# EAGLE board STM32F446 front pane - v3.1 (EAGLE 9.6.2), part 1 of 5
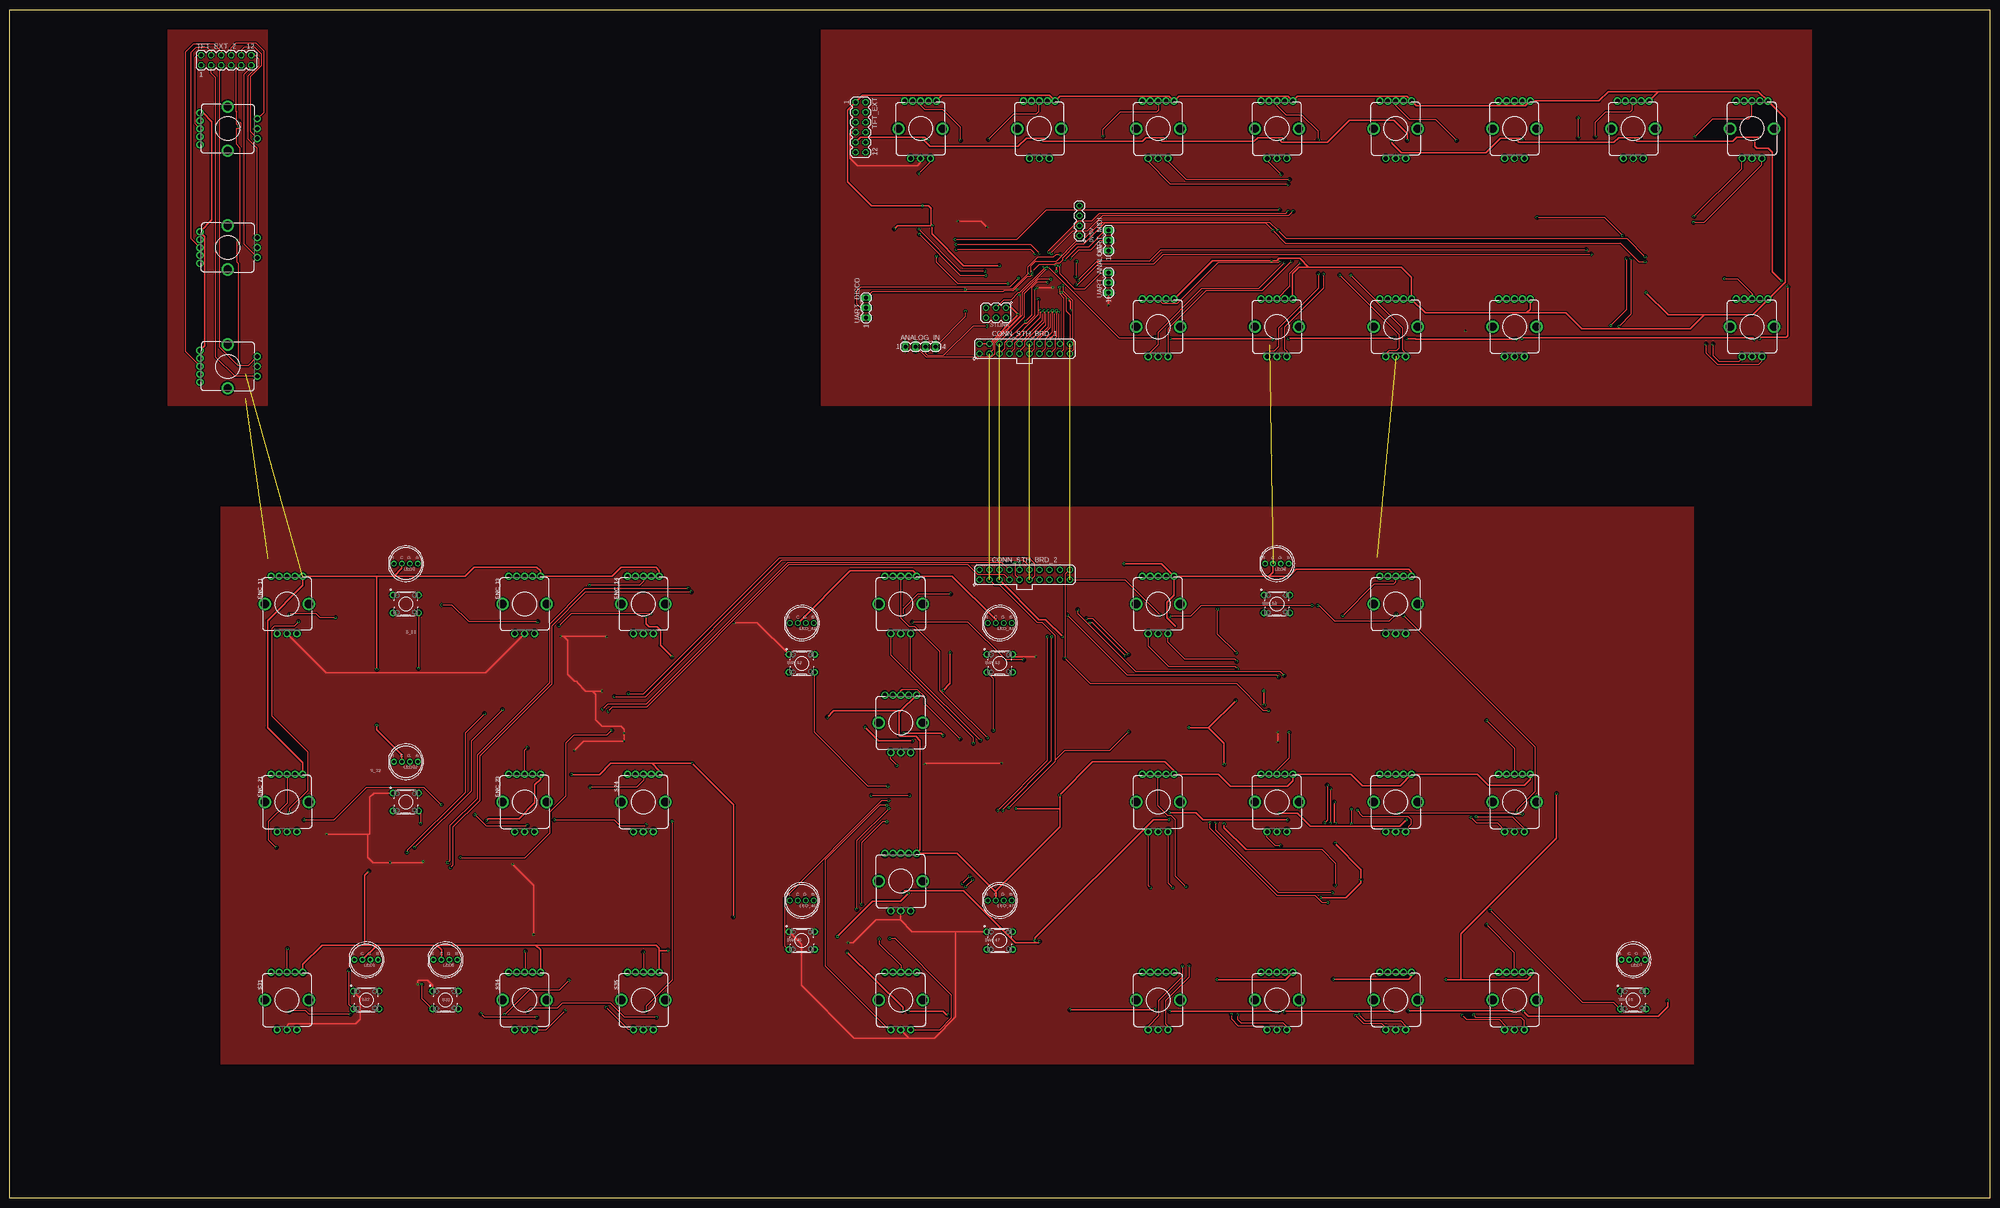
[diagram p0: board, top side]
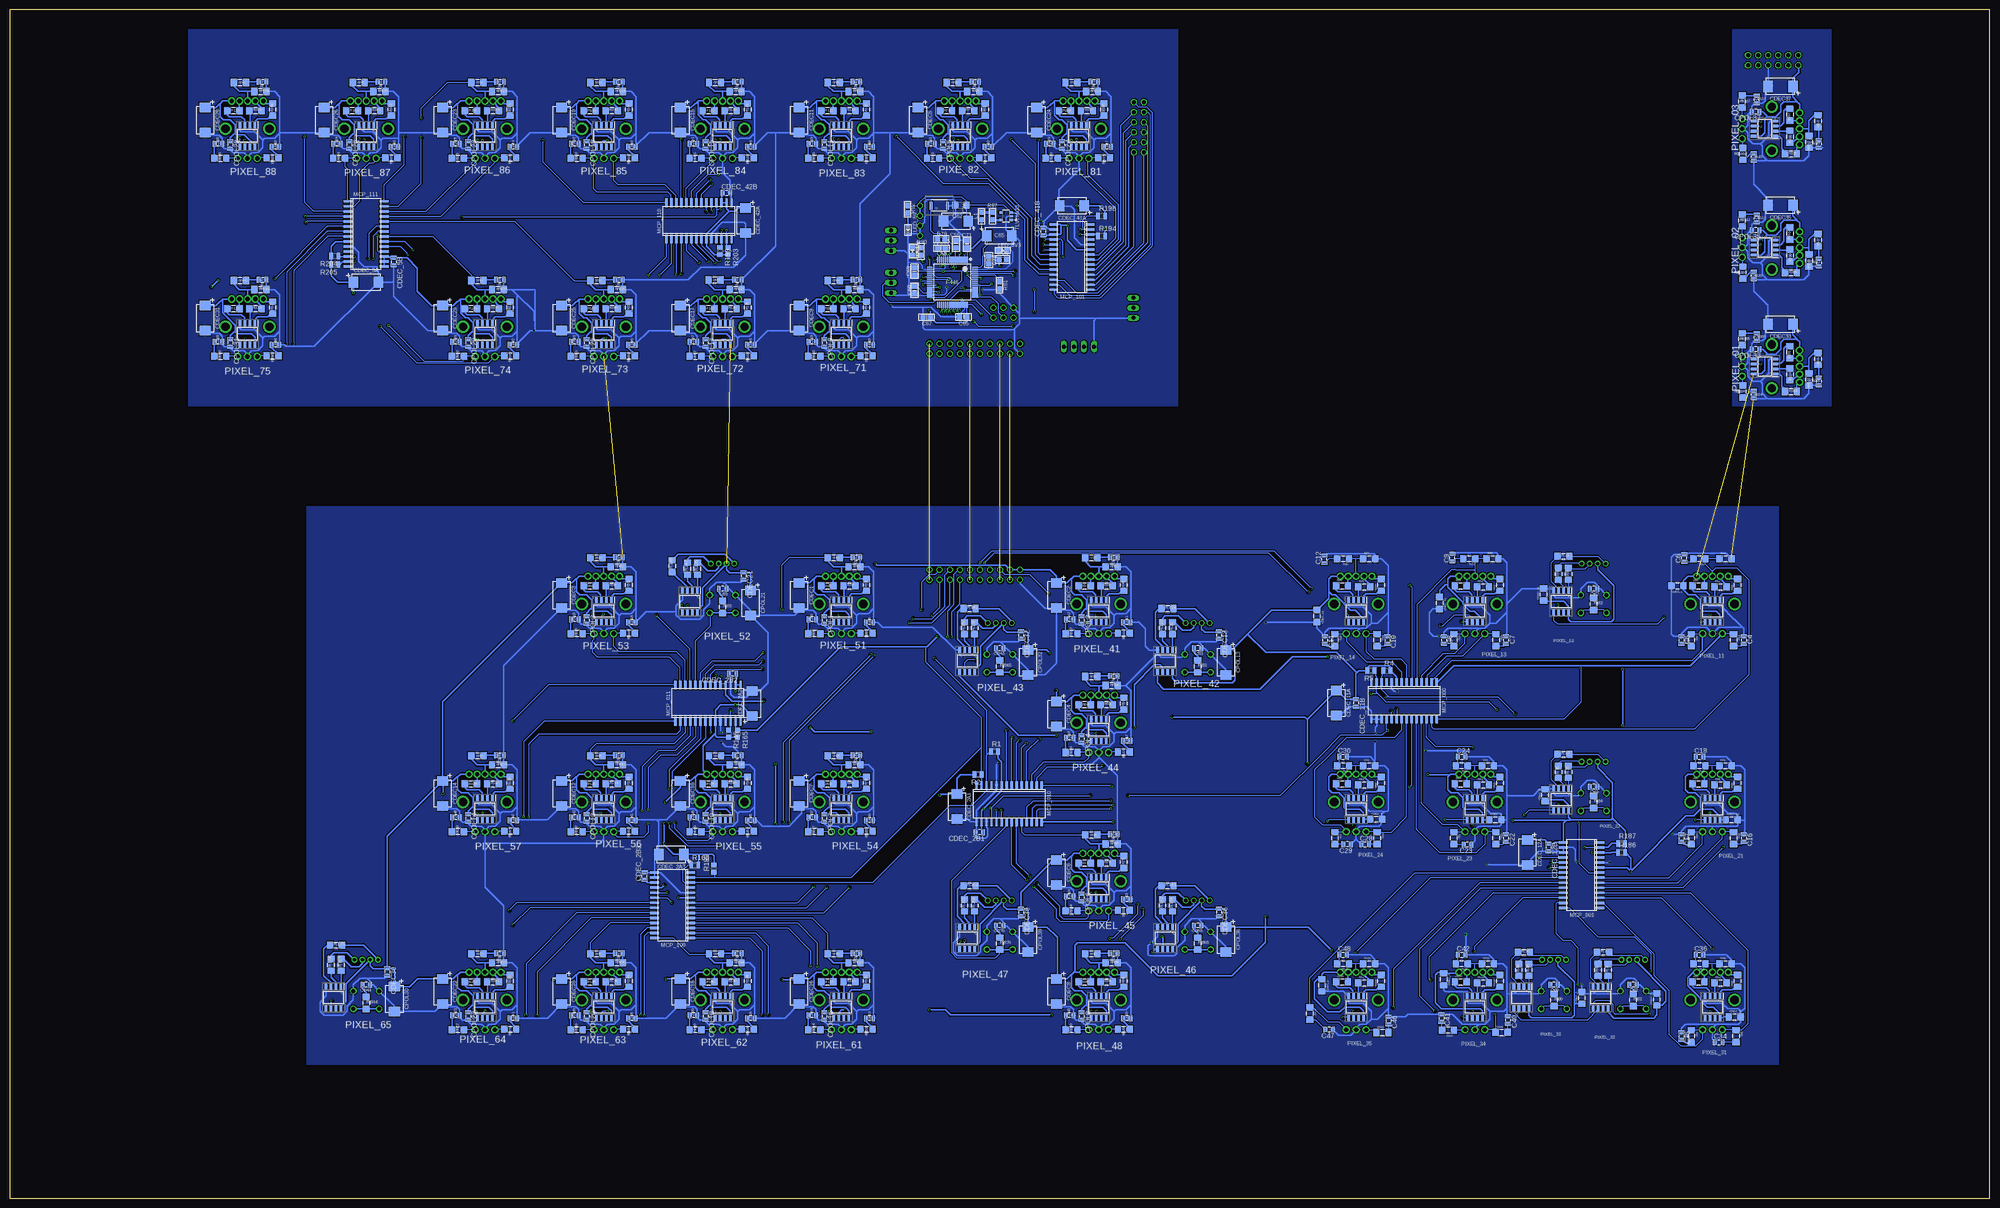
[diagram p1: board, bottom side, seen from below]

Size 500 x 300 mm. Coordinates in mm from the lower left corner, seen from the top.
Outline: 0,300 500,300 500,0 0,0 0,300
Copper layers (1*16): Top 0.035559375mm / dielectric 1.6mm / Bottom 0.035559375mm
Design rules "jlcpcb2layer": minimum track width 5mil, minimum drill 12mil, track to track 5mil, track to pad 5mil, pad to pad 5mil, via to via 5mil, smd to smd 5mil, copper to edge 8mil, drill to drill 6mil, minimum pad ring 5mil, minimum via ring 3mil, stop-mask expansion 2.5mil, vias tented up to drill 0mil, thermal gap 10mil

## Footprints (pad centres in the part's own frame; a part is rotated, then mirrored left to right if it is on the bottom)
MA04-1 = drill 1.016: 1 -3.81,0; 2 -1.27,0; 3 1.27,0; 4 3.81,0
MA04-1' = drill 1.016 long: 1 -3.81,0; 2 -1.27,0; 3 1.27,0; 4 3.81,0
0805-CAP = smd 1 x 1.5: 1 -0.95,0; 2 0.95,0
C0805 = smd 1.3 x 1.5: 1 -0.95,0; 2 0.95,0
CPOL2917 = smd 2.4 x 2.8: + -3.15,0; - 3.15,0
C1206 = smd 1.6 x 1.8: 1 -1.4,0; 2 1.4,0
1206 = smd 1.6 x 1.8: 1 -1.5,0; 2 1.5,0
MA10-2 = drill 1.016: 1 -11.43,-1.27; 2 -11.43,1.27; 3 -8.89,-1.27; 4 -8.89,1.27; 5 -6.35,-1.27; 6 -6.35,1.27; 7 -3.81,-1.27; 8 -3.81,1.27; 9 -1.27,-1.27; 10 -1.27,1.27; 11 1.27,-1.27; 12 1.27,1.27; 13 3.81,-1.27; 14 3.81,1.27; 15 6.35,-1.27; 16 6.35,1.27; 17 8.89,-1.27; 18 8.89,1.27; 19 11.43,-1.27; 20 11.43,1.27
ENCODER_LED_3 = drill 1.1 pad 1.778: 1 -4,7; 2 -2,7; 3 0,7; 4 2,7; 5 4,7 | drill 1.1 pad 1.8: A -2.5,-7.5; B 2.5,-7.5; C 0,-7.5 | drill 2.1: M1 -5.55,0; M2 5.55,0
QFP50P1200X1200X160-64N = smd 1.5 x 0.3: 1 -5.7,3.75; 2 -5.7,3.25; 3 -5.7,2.75; 4 -5.7,2.25; 5 -5.7,1.75; 6 -5.7,1.25; 7 -5.7,0.75; 8 -5.7,0.25; 9 -5.7,-0.25; 10 -5.7,-0.75; 11 -5.7,-1.25; 12 -5.7,-1.75; 13 -5.7,-2.25; 14 -5.7,-2.75; 15 -5.7,-3.25; 16 -5.7,-3.75; 33 5.7,-3.75; 34 5.7,-3.25; 35 5.7,-2.75; 36 5.7,-2.25; 37 5.7,-1.75; 38 5.7,-1.25; 39 5.7,-0.75; 40 5.7,-0.25; 41 5.7,0.25; 42 5.7,0.75; 43 5.7,1.25; 44 5.7,1.75; 45 5.7,2.25; 46 5.7,2.75; 47 5.7,3.25; 48 5.7,3.75 | smd 0.3 x 1.5: 17 -3.75,-5.7; 18 -3.25,-5.7; 19 -2.75,-5.7; 20 -2.25,-5.7; 21 -1.75,-5.7; 22 -1.25,-5.7; 23 -0.75,-5.7; 24 -0.25,-5.7; 25 0.25,-5.7; 26 0.75,-5.7; 27 1.25,-5.7; 28 1.75,-5.7; 29 2.25,-5.7; 30 2.75,-5.7; 31 3.25,-5.7; 32 3.75,-5.7; 49 3.75,5.7; 50 3.25,5.7; 51 2.75,5.7; 52 2.25,5.7; 53 1.75,5.7; 54 1.25,5.7; 55 0.75,5.7; 56 0.25,5.7; 57 -0.25,5.7; 58 -0.75,5.7; 59 -1.25,5.7; 60 -1.75,5.7; 61 -2.25,5.7; 62 -2.75,5.7; 63 -3.25,5.7; 64 -3.75,5.7
0805-LED = smd 1.2 x 1.2: A -1.05,0; C 1.05,0
L0805 = smd 1.3 x 1.5: 1 -0.95,0; 2 0.95,0
LED4-2.0-D8.0MM = drill 0.85 pad 1.4: 1 3,0; 2 1,0; 3 -1,0; 4 -3,0
0603-LED = smd 0.8 x 1: A 0.825,0; C -0.825,0
SOIC-28 = smd 2.2 x 0.6: 1 -4.6,8.255; 2 -4.6,6.985; 3 -4.6,5.715; 4 -4.6,4.445; 5 -4.6,3.175; 6 -4.6,1.905; 7 -4.6,0.635; 8 -4.6,-0.635; 9 -4.6,-1.905; 10 -4.6,-3.175; 11 -4.6,-4.445; 12 -4.6,-5.715; 13 -4.6,-6.985; 14 -4.6,-8.255; 15 4.6,-8.255; 16 4.6,-6.985; 17 4.6,-5.715; 18 4.6,-4.445; 19 4.6,-3.175; 20 4.6,-1.905; 21 4.6,-0.635; 22 4.6,0.635; 23 4.6,1.905; 24 4.6,3.175; 25 4.6,4.445; 26 4.6,5.715; 27 4.6,6.985; 28 4.6,8.255
SOIC127P600X175-8N = smd 1.528 x 0.65: 1 -2.711,1.905; 2 -2.711,0.635; 3 -2.711,-0.635; 4 -2.711,-1.905; 5 2.711,-1.905; 6 2.711,-0.635; 7 2.711,0.635; 8 2.711,1.905
R0805 = smd 1.016 x 1.422: 1 -0.889,0; 2 0.889,0
R0805' = smd 1.3 x 1.5: 1 -0.95,0; 2 0.95,0
SKRKAEE020 = smd 0.8 x 2: 1 -2.1,0; 2 2.1,0
B3F-1000 = drill 1 pad 1.6: 1 -3.25,2.25; 2 3.25,2.25; 3 -3.25,-2.25; 4 3.25,-2.25
MA03-2 = drill 1.016: 1 -2.54,-1.27; 2 -2.54,1.27; 3 0,-1.27; 4 0,1.27; 5 2.54,-1.27; 6 2.54,1.27
MA06-2 = drill 1.016 octagon: 1 -6.35,-1.27; 2 -6.35,1.27; 3 -3.81,-1.27; 4 -3.81,1.27; 5 -1.27,-1.27; 6 -1.27,1.27; 7 1.27,-1.27; 8 1.27,1.27; 9 3.81,-1.27; 10 3.81,1.27; 11 6.35,-1.27; 12 6.35,1.27
SOT95P280X145-5N = smd 1.21 x 0.59: 1 -1.255,0.95; 2 -1.255,0; 3 -1.255,-0.95; 4 1.255,-0.95; 5 1.255,0.95
MA03-1 = drill 1.016 long: 1 -2.54,0; 2 0,0; 3 2.54,0

## Placement (x,y rotation side)
0V/5V  [MA04-1]  270.1,246.75 90 top
ANALOG_IN  [MA04-1']  230,215 0 top
C4  10n  [0805-CAP]  62.13,140.86 270 bottom
C5  10n  [0805-CAP]  77.87,140.86 270 bottom
C6  10n  [0805-CAP]  77.08,161.63 90 bottom
C7  10n  [0805-CAP]  122.13,140.86 270 bottom
C8  10n  [0805-CAP]  137.87,140.86 270 bottom
C9  10n  [0805-CAP]  135.63,161.7 90 bottom
C10  10n  [0805-CAP]  152.13,140.86 270 bottom
C11  10n  [0805-CAP]  167.87,140.86 270 bottom
C12  10n  [0805-CAP]  168.01,161.29 90 bottom
C16  10n  [0805-CAP]  62.13,90.86 270 bottom
C17  10n  [0805-CAP]  77.87,90.86 270 bottom
C18  10n  [0805-CAP]  73.3,111.43 0 bottom
C22  10n  [0805-CAP]  122.13,90.86 270 bottom
C23  10n  [0805-CAP]  131.88,89.25 180 bottom
C24  10n  [0805-CAP]  133.3,111.43 0 bottom
C28  10n  [0805-CAP]  157.77,89.28 0 bottom
C29  10n  [0805-CAP]  162.24,89.28 180 bottom
C30  10n  [0805-CAP]  163.3,111.43 0 bottom
C34  10n  [0805-CAP]  68.4,39.33 0 bottom
C35  10n  [0805-CAP]  77.87,40.86 270 bottom
C36  10n  [0805-CAP]  73.3,61.43 0 bottom
C40  10n  [0805-CAP]  121.62,44.92 270 bottom
C41  10n  [0805-CAP]  138.51,45.43 270 bottom
C42  10n  [0805-CAP]  133.3,61.43 0 bottom
C46  10n  [0805-CAP]  151.87,44.79 270 bottom
C47  10n  [0805-CAP]  166.77,42.54 180 bottom
C48  10n  [0805-CAP]  163.3,61.43 0 bottom
C55  0.1uF  [C0805]  261.1,240.89 270 bottom
C60  2.2uF  [C0805]  271.48,229.24 90 bottom
C62  10u  [CPOL2917]  261.05,246.65 180 bottom
C65  100 uF  [CPOL2917]  250.07,243.02 0 bottom
C66  0.1uF  [C0805]  259.19,222.46 0 bottom
C67  0.1uF  [C0805]  268.46,222.38 0 bottom
C68  0.1uF  [C0805]  264.72,239.78 180 bottom
C69  0.1uF  [C0805]  271.55,233.96 90 bottom
C70  0.1uF  [C0805]  252.77,236.86 90 bottom
C71  1.0uF  [C0805]  258.22,240.83 270 bottom
C76  1u  [C1206]  259.81,250.69 0 bottom
CB1  10n  [0805-CAP]  90,53.81 180 bottom
CB2  10n  [0805-CAP]  100,153.81 180 bottom
CB3  10n  [0805-CAP]  200,138.81 180 bottom
CB4  10n  [0805-CAP]  100,103.81 180 bottom
CB5  10n  [0805-CAP]  320,153.81 180 bottom
CB6  10n  [0805-CAP]  110,53.81 180 bottom
CB8  10n  [0805-CAP]  282.89,145.43 180 bottom
CB9  10n  [0805-CAP]  297.37,146.19 180 bottom
CB10  10n  [0805-CAP]  286.19,161.81 0 bottom
CB11  10n  [0805-CAP]  217.89,145.43 180 bottom
CB12  10n  [0805-CAP]  232.37,146.19 180 bottom
CB13  10n  [0805-CAP]  221.19,161.81 0 bottom
CB14  10n  [0805-CAP]  342.89,145.43 180 bottom
CB15  10n  [0805-CAP]  357.37,146.19 180 bottom
CB16  10n  [0805-CAP]  346.19,161.81 0 bottom
CB17  10n  [0805-CAP]  217.89,115.43 180 bottom
CB18  10n  [0805-CAP]  232.37,116.19 180 bottom
CB19  10n  [0805-CAP]  221.19,131.81 0 bottom
CB20  10n  [0805-CAP]  252.89,265.43 180 bottom
CB21  10n  [0805-CAP]  267.37,266.19 180 bottom
CB22  10n  [0805-CAP]  256.19,281.81 0 bottom
CB23  10n  [0805-CAP]  217.89,75.43 180 bottom
CB24  10n  [0805-CAP]  232.37,76.19 180 bottom
CB25  10n  [0805-CAP]  221.19,91.81 0 bottom
CB26  10n  [0805-CAP]  282.89,95.43 180 bottom
CB27  10n  [0805-CAP]  297.37,96.19 180 bottom
CB28  10n  [0805-CAP]  286.19,111.81 0 bottom
CB29  10n  [0805-CAP]  217.89,45.43 180 bottom
CB30  10n  [0805-CAP]  232.37,46.19 180 bottom
CB31  10n  [0805-CAP]  221.19,61.81 0 bottom
CB32  10n  [0805-CAP]  282.89,215.43 180 bottom
CB33  10n  [0805-CAP]  297.37,216.19 180 bottom
CB34  10n  [0805-CAP]  286.19,231.81 0 bottom
CB35  10n  [0805-CAP]  312.89,95.43 180 bottom
CB36  10n  [0805-CAP]  327.37,96.19 180 bottom
CB37  10n  [0805-CAP]  316.19,111.81 0 bottom
CB38  10n  [0805-CAP]  282.89,265.43 180 bottom
CB39  10n  [0805-CAP]  297.37,266.19 180 bottom
CB40  10n  [0805-CAP]  286.19,281.81 0 bottom
CB41  10n  [0805-CAP]  342.89,95.43 180 bottom
CB42  10n  [0805-CAP]  357.37,96.19 180 bottom
CB43  10n  [0805-CAP]  346.19,111.81 0 bottom
CB44  10n  [0805-CAP]  410,53.81 180 bottom
CB45  10n  [0805-CAP]  250,138.81 180 bottom
CB47  10n  [0805-CAP]  372.89,95.43 180 bottom
CB48  10n  [0805-CAP]  387.37,96.19 180 bottom
CB49  10n  [0805-CAP]  376.19,111.81 0 bottom
CB50  10n  [0805-CAP]  312.89,265.43 180 bottom
CB51  10n  [0805-CAP]  327.37,266.19 180 bottom
CB52  10n  [0805-CAP]  316.19,281.81 0 bottom
CB53  10n  [0805-CAP]  282.89,45.43 180 bottom
CB54  10n  [0805-CAP]  297.37,46.19 180 bottom
CB55  10n  [0805-CAP]  286.19,61.81 0 bottom
CB56  10n  [0805-CAP]  312.89,215.43 180 bottom
CB57  10n  [0805-CAP]  327.37,216.19 180 bottom
CB58  10n  [0805-CAP]  316.19,231.81 0 bottom
CB59  10n  [0805-CAP]  312.89,45.43 180 bottom
CB60  10n  [0805-CAP]  327.37,46.19 180 bottom
CB61  10n  [0805-CAP]  316.19,61.81 0 bottom
CB62  10n  [0805-CAP]  342.89,265.43 180 bottom
CB63  10n  [0805-CAP]  357.37,266.19 180 bottom
CB64  10n  [0805-CAP]  346.19,281.81 0 bottom
CB65  10n  [0805-CAP]  342.89,45.43 180 bottom
CB66  10n  [0805-CAP]  357.37,46.19 180 bottom
CB67  10n  [0805-CAP]  346.19,61.81 0 bottom
CB68  10n  [0805-CAP]  200,68.81 180 bottom
CB70  10n  [0805-CAP]  250,68.81 180 bottom
CB71  10n  [0805-CAP]  372.89,45.43 180 bottom
CB72  10n  [0805-CAP]  387.37,46.19 180 bottom
CB73  10n  [0805-CAP]  376.19,61.81 0 bottom
CB74  10n  [0805-CAP]  372.89,265.43 180 bottom
CB75  10n  [0805-CAP]  387.37,266.19 180 bottom
CB76  10n  [0805-CAP]  376.19,281.81 0 bottom
CB77  10n  [0805-CAP]  222.89,265.43 180 bottom
CB78  10n  [0805-CAP]  237.37,266.19 180 bottom
CB79  10n  [0805-CAP]  226.19,281.81 0 bottom
CB80  10n  [0805-CAP]  342.89,215.43 180 bottom
CB81  10n  [0805-CAP]  357.37,216.19 180 bottom
CB82  10n  [0805-CAP]  346.19,231.81 0 bottom
CB83  10n  [0805-CAP]  402.89,265.43 180 bottom
CB84  10n  [0805-CAP]  417.37,266.19 180 bottom
CB85  10n  [0805-CAP]  406.19,281.81 0 bottom
CB89  10n  [0805-CAP]  432.89,265.43 180 bottom
CB90  10n  [0805-CAP]  447.37,266.19 180 bottom
CB91  10n  [0805-CAP]  436.19,281.81 0 bottom
CB92  10n  [0805-CAP]  372.89,215.43 180 bottom
CB93  10n  [0805-CAP]  387.37,216.19 180 bottom
CB94  10n  [0805-CAP]  376.19,231.81 0 bottom
CB98  10n  [0805-CAP]  432.89,215.43 180 bottom
CB99  10n  [0805-CAP]  447.37,216.19 180 bottom
CB100  10n  [0805-CAP]  436.19,231.81 0 bottom
CB104  10n  [0805-CAP]  59.57,202.89 90 bottom
CB105  10n  [0805-CAP]  58.81,217.37 90 bottom
CB106  10n  [0805-CAP]  43.19,206.19 270 bottom
CB110  10n  [0805-CAP]  59.57,232.89 90 bottom
CB111  10n  [0805-CAP]  58.81,247.37 90 bottom
CB112  10n  [0805-CAP]  43.19,236.19 270 bottom
CB116  10n  [0805-CAP]  59.57,262.89 90 bottom
CB117  10n  [0805-CAP]  58.81,277.37 90 bottom
CB118  10n  [0805-CAP]  43.19,266.19 270 bottom
CDEC1  10u  [CPOL2917]  300.67,152.16 270 bottom
CDEC2  10u  [CPOL2917]  235.67,152.16 270 bottom
CDEC3  10u  [CPOL2917]  360.67,152.16 270 bottom
CDEC4  10u  [CPOL2917]  235.67,122.16 270 bottom
CDEC5  10u  [CPOL2917]  270.67,272.16 270 bottom
CDEC6  10u  [CPOL2917]  235.67,82.16 270 bottom
CDEC7  10u  [CPOL2917]  300.67,102.16 270 bottom
CDEC8  10u  [CPOL2917]  235.67,52.16 270 bottom
CDEC9  10u  [CPOL2917]  300.67,222.16 270 bottom
CDEC10  10u  [CPOL2917]  330.67,102.16 270 bottom
CDEC11  10u  [CPOL2917]  300.67,272.16 270 bottom
CDEC12  10u  [CPOL2917]  360.67,102.16 270 bottom
CDEC13  100n  [0805-CAP]  194.67,142.11 270 bottom
CDEC14  10u  [CPOL2917]  390.67,102.16 270 bottom
CDEC15  10u  [CPOL2917]  330.67,272.16 270 bottom
CDEC16  10u  [CPOL2917]  300.67,52.16 270 bottom
CDEC17  10u  [CPOL2917]  330.67,222.16 270 bottom
CDEC18  10u  [CPOL2917]  330.67,52.16 270 bottom
CDEC19  10u  [CPOL2917]  360.67,272.16 270 bottom
CDEC20  10u  [CPOL2917]  360.67,52.16 270 bottom
CDEC21  100n  [0805-CAP]  314.67,157.11 270 bottom
CDEC22  10u  [CPOL2917]  390.67,52.16 270 bottom
CDEC23  10u  [CPOL2917]  390.67,272.16 270 bottom
CDEC24  10u  [CPOL2917]  240.67,272.16 270 bottom
CDEC25  10u  [CPOL2917]  360.67,222.16 270 bottom
CDEC26  10u  [CPOL2917]  420.67,272.16 270 bottom
CDEC28  10u  [CPOL2917]  450.67,272.16 270 bottom
CDEC29  10u  [CPOL2917]  390.67,222.16 270 bottom
CDEC30  100n  [0805-CAP]  404.67,57.11 270 bottom
CDEC31  10u  [CPOL2917]  450.67,222.16 270 bottom
CDEC32  100n  [0805-CAP]  244.67,142.11 270 bottom
CDEC33  10u  [CPOL2917]  52.84,220.67 180 bottom
CDEC35  10u  [CPOL2917]  52.84,250.67 180 bottom
CDEC36  100n  [0805-CAP]  194.67,72.11 270 bottom
CDEC37  10u  [CPOL2917]  52.84,280.67 180 bottom
CDEC39  100n  [0805-CAP]  244.67,72.11 270 bottom
CDEC_1  100n  [1206]  84.06,50.16 90 bottom
CDEC_2  100n  [1206]  102.98,50.55 90 bottom
CDEC_2A1  10u  [CPOL2917]  260.84,98.81 270 bottom
CDEC_2A2  10u  [CPOL2917]  312.53,124.84 90 bottom
CDEC_2A3  10u  [CPOL2917]  332.98,86.74 180 bottom
CDEC_2B1  100n  [0805-CAP]  255.12,92.33 180 bottom
CDEC_2B2  100n  [0805-CAP]  317.48,132.33 180 bottom
CDEC_2B3  100n  [0805-CAP]  339.71,81.28 90 bottom
CDEC_3  100n  [1206]  64.37,45.72 0 bottom
CDEC_4  100n  [1206]  137.9,55.24 270 bottom
CDEC_5  100n  [1206]  168.64,53.72 270 bottom
CDEC_5A  10u  [CPOL2917]  410.06,231.23 0 bottom
CDEC_5B  100n  [0805-CAP]  403.08,236.44 270 bottom
CDEC_6  100n  [1206]  154.92,95.63 0 bottom
CDEC_7  100n  [1206]  124.82,95.5 0 bottom
CDEC_8  100n  [1206]  112.25,101.73 90 bottom
CDEC_9  100n  [1206]  78.85,154.56 180 bottom
CDEC_10  100n  [1206]  112.63,152.4 90 bottom
CDEC_11  100n  [1206]  138.92,150.24 270 bottom
CDEC_11A  10u  [CPOL2917]  165,125 270 bottom
CDEC_11B  100n  [0805-CAP]  160,125 270 bottom
CDEC_12  100n  [1206]  65.13,95.5 0 bottom
CDEC_12A  10u  [CPOL2917]  116.69,87.26 270 bottom
CDEC_12B  100n  [0805-CAP]  111.4,88.53 270 bottom
CDEC_13  100n  [1206]  169.91,146.94 270 bottom
CDEC_41A  10u  [CPOL2917]  231.76,250.54 180 bottom
CDEC_41B  100n  [0805-CAP]  239,244.06 90 bottom
CDEC_42A  10u  [CPOL2917]  314.18,246.85 270 bottom
CDEC_42B  100n  [0805-CAP]  319,253.84 0 bottom
CONN_STH_BRD_1  [MA10-2]  256.27,214.47 0 top
CONN_STH_BRD_2  [MA10-2]  256.27,157.35 0 top
CPOL1  100n  [0805-CAP]  294.32,145.94 270 bottom
CPOL2  100n  [0805-CAP]  229.32,145.94 270 bottom
CPOL3  100n  [0805-CAP]  354.32,145.94 270 bottom
CPOL4  100n  [0805-CAP]  229.32,115.94 270 bottom
CPOL5  100n  [0805-CAP]  264.32,265.94 270 bottom
CPOL6  100n  [0805-CAP]  229.32,75.94 270 bottom
CPOL7  100n  [0805-CAP]  294.32,95.94 270 bottom
CPOL8  100n  [0805-CAP]  229.32,45.94 270 bottom
CPOL9  100n  [0805-CAP]  294.32,215.94 270 bottom
CPOL10  100n  [0805-CAP]  324.32,95.94 270 bottom
CPOL11  100n  [0805-CAP]  294.32,265.94 270 bottom
CPOL12  100n  [0805-CAP]  354.32,95.94 270 bottom
CPOL13  10u  [CPOL2917]  192.89,135.25 270 bottom
CPOL14  100n  [0805-CAP]  384.32,95.94 270 bottom
CPOL15  100n  [0805-CAP]  324.32,265.94 270 bottom
CPOL16  100n  [0805-CAP]  294.32,45.94 270 bottom
CPOL17  100n  [0805-CAP]  324.32,215.94 270 bottom
CPOL18  100n  [0805-CAP]  324.32,45.94 270 bottom
CPOL19  100n  [0805-CAP]  354.32,265.94 270 bottom
CPOL20  100n  [0805-CAP]  354.32,45.94 270 bottom
CPOL21  10u  [CPOL2917]  312.89,150.25 270 bottom
CPOL22  100n  [0805-CAP]  384.32,45.94 270 bottom
CPOL23  100n  [0805-CAP]  384.32,265.94 270 bottom
CPOL24  100n  [0805-CAP]  234.32,265.94 270 bottom
CPOL25  100n  [0805-CAP]  354.32,215.94 270 bottom
CPOL26  100n  [0805-CAP]  414.32,265.94 270 bottom
CPOL28  100n  [0805-CAP]  444.32,265.94 270 bottom
CPOL29  100n  [0805-CAP]  384.32,215.94 270 bottom
CPOL30  10u  [CPOL2917]  402.89,50.25 270 bottom
CPOL31  100n  [0805-CAP]  444.32,215.94 270 bottom
CPOL32  10u  [CPOL2917]  242.89,135.25 270 bottom
CPOL33  100n  [0805-CAP]  59.06,214.32 180 bottom
CPOL35  100n  [0805-CAP]  59.06,244.32 180 bottom
CPOL36  10u  [CPOL2917]  192.89,65.25 270 bottom
CPOL37  100n  [0805-CAP]  59.06,274.32 180 bottom
CPOL39  10u  [CPOL2917]  242.89,65.25 270 bottom
ENC_01  [ENCODER_LED_3]  55,210 90 top
ENC_02  [ENCODER_LED_3]  55,240 90 top
ENC_3  [ENCODER_LED_3]  55,270 90 top
ENC_11  [ENCODER_LED_3]  70,150 0 top
ENC_13  [ENCODER_LED_3]  130,150 0 top
ENC_14  [ENCODER_LED_3]  160,150 0 top
ENC_21  [ENCODER_LED_3]  70,100 0 top
ENC_23  [ENCODER_LED_3]  130,100 0 top
ENC_41  [ENCODER_LED_3]  225,150 0 top
ENC_44  [ENCODER_LED_3]  225,120 0 top
ENC_45  [ENCODER_LED_3]  225,80 0 top
ENC_48  [ENCODER_LED_3]  225,50 0 top
ENC_51  [ENCODER_LED_3]  290,150 0 top
ENC_53  [ENCODER_LED_3]  350,150 0 top
ENC_54  [ENCODER_LED_3]  290,100 0 top
ENC_55  [ENCODER_LED_3]  320,100 0 top
ENC_56  [ENCODER_LED_3]  350,100 0 top
ENC_57  [ENCODER_LED_3]  380,100 0 top
ENC_61  [ENCODER_LED_3]  290,50 0 top
ENC_62  [ENCODER_LED_3]  320,50 0 top
ENC_63  [ENCODER_LED_3]  350,50 0 top
ENC_64  [ENCODER_LED_3]  380,50 0 top
ENC_71  [ENCODER_LED_3]  290,220 0 top
ENC_72  [ENCODER_LED_3]  320,220 0 top
ENC_73  [ENCODER_LED_3]  350,220 0 top
ENC_74  [ENCODER_LED_3]  380,220 0 top
ENC_75  [ENCODER_LED_3]  440,220 0 top
ENC_81  [ENCODER_LED_3]  230,270 0 top
ENC_82  [ENCODER_LED_3]  260,270 0 top
ENC_83  [ENCODER_LED_3]  290,270 0 top
ENC_84  [ENCODER_LED_3]  320,270 0 top
ENC_85  [ENCODER_LED_3]  350,270 0 top
ENC_86  [ENCODER_LED_3]  380,270 0 top
ENC_87  [ENCODER_LED_3]  410,270 0 top
ENC_88  [ENCODER_LED_3]  440,270 0 top
F446  STM32F446RCT7  [QFP50P1200X1200X160-64N]  261.97,231.26 270 bottom
GREEN  [0805-LED]  272.01,239.13 270 bottom
L1  1 uH  [L0805]  254.63,247.94 270 bottom
LED1  CZXR-80RGB03-A  [LED4-2.0-D8.0MM]  90,60.16 180 top
LED2  CZXR-80RGB03-A  [LED4-2.0-D8.0MM]  100,160.16 180 top
LED4  CZXR-80RGB03-A  [LED4-2.0-D8.0MM]  320,160.16 180 top
LED6  CZXR-80RGB03-A  [LED4-2.0-D8.0MM]  110,60.16 180 top
LED7  CZXR-80RGB03-A  [LED4-2.0-D8.0MM]  410,60.16 180 top
LED22  CZXR-80RGB03-A  [LED4-2.0-D8.0MM]  100,110.16 180 top
LED_3V3  [0805-LED]  249.27,239.26 0 bottom
LED_5V  [0603-LED]  273.15,244.47 90 bottom
LED_42  CZXR-80RGB03-A  [LED4-2.0-D8.0MM]  200,145.16 180 top
LED_43  CZXR-80RGB03-A  [LED4-2.0-D8.0MM]  250,145.16 180 top
LED_46  CZXR-80RGB03-A  [LED4-2.0-D8.0MM]  200,75.16 180 top
LED_47  CZXR-80RGB03-A  [LED4-2.0-D8.0MM]  250,75.16 180 top
MCP_000  MCP23017  [SOIC-28]  147.87,125.54 270 bottom
MCP_001  MCP23017  [SOIC-28]  103.05,81.53 180 bottom
MCP_010  MCP23017  [SOIC-28]  247.63,99.57 270 bottom
MCP_011  MCP23017  [SOIC-28]  323.7,124.97 90 bottom
MCP_100  MCP23017  [SOIC-28]  332.59,73.91 180 bottom
MCP_101  MCP23017  [SOIC-28]  231.76,237.58 180 bottom
MCP_110  MCP23017  [SOIC-28]  325.99,246.73 90 bottom
MCP_111  MCP23017  [SOIC-28]  410.06,243.43 0 bottom
PIXE_82  NEOPIXEL-TLC59731DR  [SOIC127P600X175-8N]  260,268.22 270 bottom
PIXEL_01  NEOPIXEL-TLC59731DR  [SOIC127P600X175-8N]  56.78,210 180 bottom
PIXEL_02  NEOPIXEL-TLC59731DR  [SOIC127P600X175-8N]  56.78,240 180 bottom
PIXEL_03  NEOPIXEL-TLC59731DR  [SOIC127P600X175-8N]  56.78,270 180 bottom
PIXEL_11  NEOPIXEL-TLC59731DR  [SOIC127P600X175-8N]  70,148.22 270 bottom
PIXEL_12  NEOPIXEL-TLC59731DR  [SOIC127P600X175-8N]  108.25,150.63 270 bottom
PIXEL_13  NEOPIXEL-TLC59731DR  [SOIC127P600X175-8N]  130,148.22 270 bottom
PIXEL_14  NEOPIXEL-TLC59731DR  [SOIC127P600X175-8N]  160,148.22 270 bottom
PIXEL_21  NEOPIXEL-TLC59731DR  [SOIC127P600X175-8N]  70,98.22 270 bottom
PIXEL_22  NEOPIXEL-TLC59731DR  [SOIC127P600X175-8N]  108.25,100.64 270 bottom
PIXEL_23  NEOPIXEL-TLC59731DR  [SOIC127P600X175-8N]  130,98.22 270 bottom
PIXEL_24  NEOPIXEL-TLC59731DR  [SOIC127P600X175-8N]  160,98.22 270 bottom
PIXEL_31  NEOPIXEL-TLC59731DR  [SOIC127P600X175-8N]  70,48.22 270 bottom
PIXEL_32  NEOPIXEL-TLC59731DR  [SOIC127P600X175-8N]  98.25,50.63 270 bottom
PIXEL_33  NEOPIXEL-TLC59731DR  [SOIC127P600X175-8N]  118.25,50.63 270 bottom
PIXEL_34  NEOPIXEL-TLC59731DR  [SOIC127P600X175-8N]  130,48.22 270 bottom
PIXEL_35  NEOPIXEL-TLC59731DR  [SOIC127P600X175-8N]  160,48.22 270 bottom
PIXEL_41  NEOPIXEL-TLC59731DR  [SOIC127P600X175-8N]  225,148.22 270 bottom
PIXEL_42  NEOPIXEL-TLC59731DR  [SOIC127P600X175-8N]  208.25,135.63 270 bottom
PIXEL_43  NEOPIXEL-TLC59731DR  [SOIC127P600X175-8N]  258.25,135.63 270 bottom
PIXEL_44  NEOPIXEL-TLC59731DR  [SOIC127P600X175-8N]  225,118.22 270 bottom
PIXEL_45  NEOPIXEL-TLC59731DR  [SOIC127P600X175-8N]  225,78.22 270 bottom
PIXEL_46  NEOPIXEL-TLC59731DR  [SOIC127P600X175-8N]  208.25,65.64 270 bottom
PIXEL_47  NEOPIXEL-TLC59731DR  [SOIC127P600X175-8N]  258.25,65.64 270 bottom
PIXEL_48  NEOPIXEL-TLC59731DR  [SOIC127P600X175-8N]  225,48.22 270 bottom
PIXEL_51  NEOPIXEL-TLC59731DR  [SOIC127P600X175-8N]  290,148.22 270 bottom
PIXEL_52  NEOPIXEL-TLC59731DR  [SOIC127P600X175-8N]  328.25,150.63 270 bottom
PIXEL_53  NEOPIXEL-TLC59731DR  [SOIC127P600X175-8N]  350,148.22 270 bottom
PIXEL_54  NEOPIXEL-TLC59731DR  [SOIC127P600X175-8N]  290,98.22 270 bottom
PIXEL_55  NEOPIXEL-TLC59731DR  [SOIC127P600X175-8N]  320,98.22 270 bottom
PIXEL_56  NEOPIXEL-TLC59731DR  [SOIC127P600X175-8N]  350,98.22 270 bottom
PIXEL_57  NEOPIXEL-TLC59731DR  [SOIC127P600X175-8N]  380,98.22 270 bottom
PIXEL_61  NEOPIXEL-TLC59731DR  [SOIC127P600X175-8N]  290,48.22 270 bottom
PIXEL_62  NEOPIXEL-TLC59731DR  [SOIC127P600X175-8N]  320,48.22 270 bottom
PIXEL_63  NEOPIXEL-TLC59731DR  [SOIC127P600X175-8N]  350,48.22 270 bottom
PIXEL_64  NEOPIXEL-TLC59731DR  [SOIC127P600X175-8N]  380,48.22 270 bottom
PIXEL_65  NEOPIXEL-TLC59731DR  [SOIC127P600X175-8N]  418.25,50.63 270 bottom
PIXEL_71  NEOPIXEL-TLC59731DR  [SOIC127P600X175-8N]  290,218.22 270 bottom
PIXEL_72  NEOPIXEL-TLC59731DR  [SOIC127P600X175-8N]  320,218.22 270 bottom
PIXEL_73  NEOPIXEL-TLC59731DR  [SOIC127P600X175-8N]  350,218.22 270 bottom
PIXEL_74  NEOPIXEL-TLC59731DR  [SOIC127P600X175-8N]  380,218.22 270 bottom
PIXEL_75  NEOPIXEL-TLC59731DR  [SOIC127P600X175-8N]  440,218.22 270 bottom
PIXEL_81  NEOPIXEL-TLC59731DR  [SOIC127P600X175-8N]  230,268.22 270 bottom
PIXEL_83  NEOPIXEL-TLC59731DR  [SOIC127P600X175-8N]  290,268.22 270 bottom
PIXEL_84  NEOPIXEL-TLC59731DR  [SOIC127P600X175-8N]  320,268.22 270 bottom
PIXEL_85  NEOPIXEL-TLC59731DR  [SOIC127P600X175-8N]  350,268.22 270 bottom
PIXEL_86  NEOPIXEL-TLC59731DR  [SOIC127P600X175-8N]  380,268.22 270 bottom
PIXEL_87  NEOPIXEL-TLC59731DR  [SOIC127P600X175-8N]  410,268.22 270 bottom
PIXEL_88  NEOPIXEL-TLC59731DR  [SOIC127P600X175-8N]  440,268.22 270 bottom
R1  1k  [R0805]  251.31,112.78 0 bottom
R2  1k  [R0805]  255.5,106.93 180 bottom
R3  100  [1206]  96.35,57.62 90 bottom
R4  1k  [R0805]  152.19,133.16 0 bottom
R5  1k  [R0805]  156.25,133.16 180 bottom
R6  100  [1206]  98.89,57.62 90 bottom
R7  100  [1206]  97.62,62.06 0 bottom
R8  100  [1206]  106.35,157.62 90 bottom
R9  100  [1206]  108.89,157.62 90 bottom
R10  100  [1206]  63.65,154.83 90 bottom
R11  100  [1206]  67.97,154.32 0 bottom
R12  100  [1206]  73.56,154.57 0 bottom
R13  10k  [1206]  66.7,161.43 0 bottom
R14  470  [1206]  64.67,140.86 270 bottom
R15  470  [1206]  75.33,140.86 270 bottom
R16  470  [1206]  73.3,161.43 180 bottom
R17  100  [1206]  123.65,154.83 90 bottom
R18  100  [1206]  127.97,154.32 0 bottom
R19  100  [1206]  133.56,154.57 0 bottom
R20  10k  [1206]  125.56,161.43 0 bottom
R21  470  [1206]  124.67,140.86 270 bottom
R22  470  [1206]  135.33,140.86 270 bottom
R23  470  [1206]  131.4,161.43 180 bottom
R24  100  [1206]  153.65,154.83 90 bottom
R25  100  [1206]  157.97,154.32 0 bottom
R26  100  [1206]  163.56,154.57 0 bottom
R27  10k  [1206]  156.7,161.43 0 bottom
R28  470  [1206]  154.67,140.86 270 bottom
R29  470  [1206]  165.33,140.86 270 bottom
R30  470  [1206]  163.3,161.43 180 bottom
R31  100  [1206]  107.62,162.06 0 bottom
R32  100  [1206]  206.35,143.89 90 bottom
R33  100  [1206]  283.65,154.83 90 bottom
R34  100  [1206]  287.97,154.57 0 bottom
R35  100  [1206]  106.35,107.62 90 bottom
R36  100  [1206]  108.89,107.62 90 bottom
R37  100  [1206]  107.62,112.06 0 bottom
R38  100  [1206]  63.65,104.83 90 bottom
R39  100  [1206]  67.97,104.32 0 bottom
R40  100  [1206]  73.56,104.57 0 bottom
R41  10k  [1206]  66.7,109.14 0 bottom
R42  470  [1206]  64.67,90.86 270 bottom
R43  470  [1206]  75.33,90.86 270 bottom
R44  470  [1206]  73.3,109.14 180 bottom
R45  100  [1206]  293.56,154.57 0 bottom
R46  100  [1206]  218.65,154.83 90 bottom
R47  100  [1206]  222.97,154.57 0 bottom
R48  100  [1206]  116.35,57.62 90 bottom
R49  100  [1206]  118.89,57.62 90 bottom
R50  100  [1206]  117.62,62.06 0 bottom
R51  100  [1206]  228.56,154.57 0 bottom
R52  100  [1206]  123.65,104.83 90 bottom
R53  100  [1206]  127.97,104.32 0 bottom
R54  100  [1206]  133.56,104.57 0 bottom
R55  10k  [1206]  126.7,109.14 0 bottom
R56  470  [1206]  124.67,90.86 270 bottom
R57  470  [1206]  135.33,90.86 270 bottom
R58  470  [1206]  133.3,109.14 180 bottom
R59  100  [1206]  343.65,154.83 90 bottom
R60  100  [1206]  347.97,154.57 0 bottom
R61  100  [1206]  353.56,154.57 0 bottom
R62  100  [1206]  218.65,124.83 90 bottom
R63  100  [1206]  222.97,124.57 0 bottom
R64  100  [1206]  228.56,124.57 0 bottom
R65  100  [1206]  253.65,274.83 90 bottom
R66  100  [1206]  153.65,104.83 90 bottom
R67  100  [1206]  157.97,104.32 0 bottom
R68  100  [1206]  163.56,104.57 0 bottom
R69  10k  [1206]  156.7,109.14 0 bottom
R70  470  [1206]  154.67,90.86 270 bottom
R71  470  [1206]  165.33,90.86 270 bottom
R72  470  [1206]  163.3,109.14 180 bottom
R73  100  [1206]  257.97,274.57 0 bottom
R74  100  [1206]  263.56,274.57 0 bottom
R75  100  [1206]  218.65,84.83 90 bottom
R76  100  [1206]  222.97,84.57 0 bottom
R77  100  [1206]  228.56,84.57 0 bottom
R78  100  [1206]  283.65,104.83 90 bottom
R79  100k  [R0805']  264.77,242.05 0 bottom
R80  100  [1206]  287.97,104.57 0 bottom
R81  10K  [R0805']  250.12,230.48 270 bottom
R82  100  [1206]  63.65,54.83 90 bottom
R83  100  [1206]  293.56,104.57 0 bottom
R84  100  [1206]  67.97,54.32 0 bottom
R85  100  [1206]  73.56,54.57 0 bottom
R86  100  [1206]  218.65,54.83 90 bottom
R87  1  [R0805']  251.88,247.94 270 bottom
R88  10k  [1206]  66.7,59.14 0 bottom
R89  470  [1206]  64.03,40.86 270 bottom
R90  1k  [R0805']  269.85,239 90 bottom
R91  470  [1206]  75.33,40.86 270 bottom
R92  470  [R0805']  273.28,249.67 270 bottom
R93  470  [1206]  73.3,59.14 180 bottom
R94  100  [1206]  222.97,54.57 0 bottom
R95  1k  [R0805']  249.27,236.97 0 bottom
R96  100  [1206]  228.56,54.57 0 bottom
R97  100  [1206]  283.65,224.83 90 bottom
R98  100  [1206]  287.97,224.57 0 bottom
R99  100  [1206]  293.56,224.57 0 bottom
R100  100  [1206]  313.65,104.83 90 bottom
R101  100  [1206]  317.97,104.57 0 bottom
R102  100  [1206]  123.65,54.83 90 bottom
R103  100  [1206]  127.97,54.32 0 bottom
R104  100  [1206]  133.56,54.57 0 bottom
R105  10k  [1206]  126.7,59.14 0 bottom
R106  470  [1206]  123.26,41.81 0 bottom
R107  470  [1206]  136.8,42.39 180 bottom
R108  470  [1206]  133.3,59.14 180 bottom
R109  100  [1206]  323.56,104.57 0 bottom
R110  100  [1206]  283.65,274.83 90 bottom
R111  100  [1206]  287.97,274.57 0 bottom
R112  100  [1206]  293.56,274.57 0 bottom
R113  100  [1206]  343.65,104.83 90 bottom
R114  100  [1206]  347.97,104.57 0 bottom
R115  100  [1206]  353.56,104.57 0 bottom
R116  100  [1206]  153.65,54.83 90 bottom
R117  100  [1206]  157.97,54.32 0 bottom
R118  100  [1206]  163.56,54.57 0 bottom
R119  10k  [1206]  156.7,59.14 0 bottom
R120  470  [1206]  153.36,41.78 0 bottom
R121  470  [1206]  171.68,46.57 270 bottom
R122  470  [1206]  163.3,59.14 180 bottom
R123  100  [1206]  208.89,143.89 90 bottom
R124  100  [1206]  207.62,148.84 0 bottom
R125  100  [1206]  326.35,158.89 90 bottom
R126  100  [1206]  373.65,104.83 90 bottom
R127  100  [1206]  377.97,104.57 0 bottom
R128  100  [1206]  383.56,104.57 0 bottom
R129  100  [1206]  313.65,274.83 90 bottom
R130  100  [1206]  317.97,274.57 0 bottom
R131  100  [1206]  323.56,274.57 0 bottom
R132  100  [1206]  283.65,54.83 90 bottom
R133  100  [1206]  287.97,54.57 0 bottom
R134  100  [1206]  293.56,54.57 0 bottom
R135  100  [1206]  313.65,224.83 90 bottom
R136  100  [1206]  317.97,224.57 0 bottom
R137  100  [1206]  323.56,224.57 0 bottom
R138  100  [1206]  313.65,54.83 90 bottom
R139  100  [1206]  317.97,54.57 0 bottom
R140  100  [1206]  323.56,54.57 0 bottom
R141  100  [1206]  343.65,274.83 90 bottom
R142  100  [1206]  347.97,274.57 0 bottom
R143  100  [1206]  353.56,274.57 0 bottom
R144  100  [1206]  343.65,54.83 90 bottom
R145  100  [1206]  347.97,54.57 0 bottom
R146  100  [1206]  353.56,54.57 0 bottom
R147  100  [1206]  328.89,158.89 90 bottom
R148  100  [1206]  332.73,159.53 90 bottom
R149  1k  [R0805]  318.5,117.22 270 bottom
R150  100  [1206]  373.65,54.83 90 bottom
R151  100  [1206]  377.97,54.57 0 bottom
R152  100  [1206]  383.56,54.57 0 bottom
R153  100  [1206]  373.65,274.83 90 bottom
R154  100  [1206]  377.97,274.57 0 bottom
R155  100  [1206]  383.56,274.57 0 bottom
R156  100  [1206]  223.65,274.83 90 bottom
R157  100  [1206]  227.97,274.57 0 bottom
R158  100  [1206]  233.56,274.57 0 bottom
R159  100  [1206]  343.65,224.83 90 bottom
R160  100  [1206]  347.97,224.57 0 bottom
R161  100  [1206]  353.56,224.57 0 bottom
R162  100  [1206]  403.65,274.83 90 bottom
R163  100  [1206]  407.97,274.57 0 bottom
R164  100  [1206]  413.56,274.57 0 bottom
R165  1k  [R0805]  316.21,117.22 270 bottom
R166  1k  [R0805]  327.01,84.07 0 bottom
R167  100  [1206]  416.35,58.89 90 bottom
R168  100  [1206]  433.65,274.83 90 bottom
R169  100  [1206]  437.97,274.57 0 bottom
R170  100  [1206]  443.56,274.57 0 bottom
R171  100  [1206]  373.65,224.83 90 bottom
R172  100  [1206]  377.97,224.57 0 bottom
R173  100  [1206]  383.56,224.57 0 bottom
R174  100  [1206]  418.89,58.89 90 bottom
R175  100  [1206]  417.62,63.84 0 bottom
R176  100  [1206]  256.35,143.89 90 bottom
R177  100  [1206]  433.65,224.83 90 bottom
R178  100  [1206]  437.97,224.57 0 bottom
R179  100  [1206]  443.56,224.57 0 bottom
R180  100  [1206]  258.89,143.89 90 bottom
R181  100  [1206]  257.62,148.84 0 bottom
R182  1k  [R0805]  322.18,83.19 90 bottom
R183  100  [1206]  50.17,203.65 0 bottom
R184  100  [1206]  50.43,207.97 270 bottom
R185  100  [1206]  50.43,213.56 270 bottom
R186  1k  [R0805]  92.94,87.25 0 bottom
R187  1k  [R0805]  92.94,89.53 0 bottom
R188  100  [1206]  206.35,73.89 90 bottom
R189  100  [1206]  50.17,233.65 0 bottom
R190  100  [1206]  50.43,237.97 270 bottom
R191  100  [1206]  50.43,243.56 270 bottom
R192  100  [1206]  208.89,73.89 90 bottom
R193  100  [1206]  207.62,78.84 0 bottom
R194  1k  [R0805]  224.26,242.92 0 bottom
R195  100  [1206]  50.17,263.65 0 bottom
R196  100  [1206]  50.43,267.97 270 bottom
R197  100  [1206]  50.43,273.56 270 bottom
R198  1k  [R0805]  224.26,248 0 bottom
R199  1k  [R0805]  320.66,239.11 270 bottom
R200  100  [1206]  256.35,73.89 90 bottom
R201  100  [1206]  258.89,73.89 90 bottom
R202  100  [1206]  257.62,78.84 0 bottom
R203  1k  [R0805]  318.62,239.11 270 bottom
R204  1k  [R0805]  417.94,237.84 180 bottom
R205  1k  [R0805]  417.94,235.68 180 bottom
RB1  470  [1206]  90,50 90 bottom
RB2  470  [1206]  100,150 90 bottom
RB3  470  [1206]  200,134.24 90 bottom
RB4  470  [1206]  100,100 90 bottom
RB5  470  [1206]  320,149.24 90 bottom
RB6  470  [1206]  110,50 90 bottom
RB8  470  [1206]  283.65,142.63 0 bottom
RB9  470  [1206]  296.86,142.51 180 bottom
RB10  470  [1206]  291.9,161.68 0 bottom
RB11  470  [1206]  218.65,142.63 0 bottom
RB12  470  [1206]  231.86,142.51 180 bottom
RB13  470  [1206]  226.91,161.68 0 bottom
RB14  470  [1206]  343.65,142.63 0 bottom
RB15  470  [1206]  356.86,142.51 180 bottom
RB16  470  [1206]  351.9,161.68 0 bottom
RB17  470  [1206]  218.65,112.63 0 bottom
RB18  470  [1206]  231.86,112.51 180 bottom
RB19  470  [1206]  226.91,131.68 0 bottom
RB20  470  [1206]  253.65,262.63 0 bottom
RB21  470  [1206]  266.86,262.51 180 bottom
RB22  470  [1206]  261.9,281.68 0 bottom
RB23  470  [1206]  218.65,72.63 0 bottom
RB24  470  [1206]  231.86,72.51 180 bottom
RB25  470  [1206]  226.91,91.68 0 bottom
RB26  470  [1206]  283.65,92.63 0 bottom
RB27  470  [1206]  296.86,92.51 180 bottom
RB28  470  [1206]  291.9,111.68 0 bottom
RB29  470  [1206]  218.65,42.63 0 bottom
RB30  470  [1206]  231.86,42.51 180 bottom
RB31  470  [1206]  226.91,61.68 0 bottom
RB32  470  [1206]  283.65,212.63 0 bottom
RB33  470  [1206]  296.86,212.51 180 bottom
RB34  470  [1206]  291.9,231.68 0 bottom
RB35  470  [1206]  313.65,92.63 0 bottom
RB36  470  [1206]  326.86,92.51 180 bottom
RB37  470  [1206]  321.9,111.68 0 bottom
RB38  470  [1206]  283.65,262.63 0 bottom
RB39  470  [1206]  296.86,262.51 180 bottom
RB40  470  [1206]  291.9,281.68 0 bottom
RB41  470  [1206]  343.65,92.63 0 bottom
RB42  470  [1206]  356.86,92.51 180 bottom
RB43  470  [1206]  351.9,111.68 0 bottom
RB44  470  [1206]  410,49.24 90 bottom
RB45  470  [1206]  250,134.24 90 bottom
RB47  470  [1206]  373.65,92.63 0 bottom
RB48  470  [1206]  386.86,92.51 180 bottom
RB49  470  [1206]  381.9,111.68 0 bottom
RB50  470  [1206]  313.65,262.63 0 bottom
RB51  470  [1206]  326.86,262.51 180 bottom
RB52  470  [1206]  321.9,281.68 0 bottom
RB53  470  [1206]  283.65,42.63 0 bottom
RB54  470  [1206]  296.86,42.51 180 bottom
RB55  470  [1206]  291.9,61.68 0 bottom
RB56  470  [1206]  313.65,212.63 0 bottom
RB57  470  [1206]  326.86,212.51 180 bottom
RB58  470  [1206]  322.03,231.81 0 bottom
RB59  470  [1206]  313.65,42.63 0 bottom
RB60  470  [1206]  326.86,42.51 180 bottom
RB61  470  [1206]  321.9,61.68 0 bottom
RB62  470  [1206]  343.65,262.63 0 bottom
RB63  470  [1206]  356.86,262.51 180 bottom
RB64  470  [1206]  351.9,281.68 0 bottom
RB65  470  [1206]  343.65,42.63 0 bottom
RB66  470  [1206]  356.86,42.51 180 bottom
RB67  470  [1206]  351.9,61.68 0 bottom
RB68  470  [1206]  200,64.24 90 bottom
RB70  470  [1206]  250,64.24 90 bottom
RB71  470  [1206]  373.65,42.63 0 bottom
RB72  470  [1206]  386.86,42.51 180 bottom
RB73  470  [1206]  381.9,61.68 0 bottom
RB74  470  [1206]  373.65,262.63 0 bottom
RB75  470  [1206]  386.86,262.51 180 bottom
RB76  470  [1206]  381.9,281.68 0 bottom
RB77  470  [1206]  223.65,262.63 0 bottom
RB78  470  [1206]  236.86,262.51 180 bottom
RB79  470  [1206]  231.91,281.68 0 bottom
RB80  470  [1206]  343.65,212.63 0 bottom
RB81  470  [1206]  356.86,212.51 180 bottom
RB82  470  [1206]  351.9,231.68 0 bottom
RB83  470  [1206]  403.65,262.63 0 bottom
RB84  470  [1206]  416.86,262.51 180 bottom
RB85  470  [1206]  411.9,281.68 0 bottom
RB89  470  [1206]  433.65,262.63 0 bottom
RB90  470  [1206]  446.86,262.51 180 bottom
RB91  470  [1206]  441.9,281.68 0 bottom
RB92  470  [1206]  373.65,212.63 0 bottom
RB93  470  [1206]  386.86,212.51 180 bottom
RB94  470  [1206]  381.9,231.68 0 bottom
RB98  470  [1206]  433.65,212.63 0 bottom
RB99  470  [1206]  446.86,212.51 180 bottom
RB100  470  [1206]  441.9,231.68 0 bottom
RB104  470  [1206]  62.37,203.65 270 bottom
RB105  470  [1206]  62.49,216.86 90 bottom
RB106  470  [1206]  43.32,211.91 270 bottom
RB110  470  [1206]  62.37,233.65 270 bottom
RB111  470  [1206]  62.49,246.86 90 bottom
RB112  470  [1206]  43.32,241.91 270 bottom
RB116  470  [1206]  62.37,263.65 270 bottom
RB117  470  [1206]  62.49,276.86 90 bottom
RB118  470  [1206]  43.32,271.9 270 bottom
RPD1  10k  [1206]  286.7,159.4 0 bottom
RPD2  10k  [1206]  221.7,159.4 0 bottom
RPD3  10k  [1206]  346.7,159.4 0 bottom
RPD4  10k  [1206]  221.7,129.4 0 bottom
RPD5  10k  [1206]  256.7,279.4 0 bottom
RPD6  10k  [1206]  221.7,89.4 0 bottom
RPD7  10k  [1206]  286.7,109.4 0 bottom
RPD8  10k  [1206]  221.7,59.4 0 bottom
RPD9  10k  [1206]  286.7,229.4 0 bottom
RPD10  10k  [1206]  316.7,109.4 0 bottom
RPD11  10k  [1206]  286.7,279.4 0 bottom
RPD12  10k  [1206]  346.7,109.4 0 bottom
RPD14  10k  [1206]  376.7,109.4 0 bottom
RPD15  10k  [1206]  316.7,279.4 0 bottom
RPD16  10k  [1206]  286.7,59.4 0 bottom
RPD17  10k  [1206]  316.7,229.4 0 bottom
RPD18  10k  [1206]  316.7,59.4 0 bottom
RPD19  10k  [1206]  346.7,279.4 0 bottom
RPD20  10k  [1206]  346.7,59.4 0 bottom
RPD22  10k  [1206]  376.7,59.4 0 bottom
RPD23  10k  [1206]  376.7,279.4 0 bottom
RPD24  10k  [1206]  226.7,279.4 0 bottom
RPD25  10k  [1206]  346.7,229.4 0 bottom
RPD26  10k  [1206]  406.7,279.4 0 bottom
RPD28  10k  [1206]  436.7,279.4 0 bottom
RPD29  10k  [1206]  376.7,229.4 0 bottom
RPD31  10k  [1206]  436.7,229.4 0 bottom
RPD33  10k  [1206]  45.6,206.7 270 bottom
RPD35  10k  [1206]  45.6,236.7 270 bottom
RPD37  10k  [1206]  45.6,266.7 270 bottom
S2  SWITCH-SKRKAEE020  [SKRKAEE020]  265.27,250.56 180 bottom
S24  [ENCODER_LED_3]  160,100 0 top
S31  [ENCODER_LED_3]  70,50 0 top
S32  B3F-1000  [B3F-1000]  90,50 0 top
S33  B3F-1000  [B3F-1000]  110,50 0 top
S34  [ENCODER_LED_3]  130,50 0 top
S35  [ENCODER_LED_3]  160,50 0 top
S_12  B3F-1000  [B3F-1000]  100,150 0 top
S_22  B3F-1000  [B3F-1000]  100,100 0 top
STLINK  75867-331LF  [MA03-2]  249.07,223.57 180 top
SW_42  B3F-1000  [B3F-1000]  200,135 0 top
SW_43  B3F-1000  [B3F-1000]  250,135 0 top
SW_46  B3F-1000  [B3F-1000]  200,65 0 top
SW_47  B3F-1000  [B3F-1000]  250,65 0 top
SW_52  B3F-1000  [B3F-1000]  320,150 0 top
SW_65  B3F-1000  [B3F-1000]  410,50 0 top
TFT_EXT  [MA06-2]  214.87,270.35 270 top
TFT_EXT_2  [MA06-2]  54.65,287.29 0 top
TLV75533  TLV75533PDBVR  [SOT95P280X145-5N]  248.38,247.89 180 bottom
UART_ANALOG  [MA03-1]  277.48,231.11 90 top
UART_DISCO  [MA03-1]  216.26,224.76 90 top
UART_MIDI  [MA03-1]  277.48,241.78 90 top

## Library data of the parts
0V/5V C4-C12 C16-C18 C22-C24 C28-C30 C34-C36 C40-C42 C46-C48 CB1-CB6 CB8-CB45 CB47-CB68 CB70-CB85 CB89-CB94 CB98-CB100 CB104-CB106 CB110-CB112 CB116-CB118 CDEC13 CDEC21 CDEC30 CDEC32 CDEC36 CDEC39 CDEC_1 CDEC_2 CDEC_2B1-CDEC_2B3 CDEC_3-CDEC_5 CDEC_5B CDEC_6-CDEC_11 CDEC_11B CDEC_12 CDEC_12B CDEC_13 CDEC_41B CDEC_42B CPOL1-CPOL12 CPOL14-CPOL20 CPOL22-CPOL26 CPOL28 CPOL29 CPOL31 CPOL33 CPOL35 CPOL37 R3 R6-R78 R80 R82-R86 R88 R89 R91 R93 R94 R96-R148 R150-R164 R167-R181 R183-R185 R188-R193 R195-R197 R200-R202 RB1-RB6 RB8-RB45 RB47-RB68 RB70-RB85 RB89-RB94 RB98-RB100 RB104-RB106 RB110-RB112 RB116-RB118 RPD1-RPD12 RPD14-RPD20 RPD22-RPD26 RPD28 RPD29 RPD31 RPD33 RPD35 RPD37 = stock-perso
ANALOG_IN TFT_EXT TFT_EXT_2 UART_ANALOG UART_DISCO UART_MIDI = con-lstb; OC_FARNELL: unknown; OC_NEWARK: unknown
C55 C60 C66-C71 = MyComponents; MOUSER: 80-C0805C104J5RAUTO
C62 C65 = MyComponents; MOUSER: 581-TPSE477K010R0200
C76 = rcl; SPICEPREFIX: C
CDEC1-CDEC12 CDEC14-CDEC20 CDEC22-CDEC26 CDEC28 CDEC29 CDEC31 CDEC33 CDEC35 CDEC37 CDEC_2A1-CDEC_2A3 CDEC_5A CDEC_11A CDEC_12A CDEC_41A CDEC_42A CPOL13 CPOL21 CPOL30 CPOL32 CPOL36 CPOL39 = stock-perso; MOUSER: 581-TPSE477K010R0200
CONN_STH_BRD_1 CONN_STH_BRD_2 = MyComponents; OC_FARNELL: unknown; OC_NEWARK: unknown
ENC_01 ENC_02 ENC_3 ENC_11 ENC_13 ENC_14 ENC_21 ENC_23 ENC_41 ENC_44 ENC_45 ENC_48 ENC_51 ENC_53-ENC_57 ENC_61-ENC_64 ENC_71-ENC_75 ENC_81-ENC_88 S24 S31 S34 S35 = stock-perso; PROD_ID: RES-14168
F446 = STM32F446RCT7; AVAILABILITY: Unavailable; DESCRIPTION: ARM® Cortex®-M4 STM32F4 Microcontroller IC 32-Bit 180MHz 256KB (256K x 8) FLASH 64-LQFP (10x10); DIGIKEY-PURCHASE-URL: https://snapeda.com/shop?store=DigiKey&id=703054; MF: STMicroelectronics; MP: STM32F446RCT7; PACKAGE: LQFP-64 STMicroelectronics; PRICE: None
GREEN LED_3V3 LED_5V = Passives
L1 = MyComponents; MOUSER: 963-CKP2012N1R0M-T
LED1 LED2 LED4 LED6 LED7 LED22 LED_42 LED_43 LED_46 LED_47 = OPL_Optoelectronics; MPN: CZXR-80RGB03-A
MCP_000 MCP_001 MCP_010 MCP_011 MCP_100 MCP_101 MCP_110 MCP_111 = a_ranger_work
PIXE_82 PIXEL_01-PIXEL_03 PIXEL_11-PIXEL_14 PIXEL_21-PIXEL_24 PIXEL_31-PIXEL_35 PIXEL_41-PIXEL_48 PIXEL_51-PIXEL_57 PIXEL_61-PIXEL_65 PIXEL_71-PIXEL_75 PIXEL_81 PIXEL_83-PIXEL_88 = stock-perso; ARROW_PART_NUMBER: TLC59731DR; ARROW_PRICE-STOCK: https://www.arrow.com/en/products/tlc59731dr/texas-instruments; DESCRIPTION: 3-Channel, 8-Bit, PWM LED Driver with Single-Wire Interface; HEIGHT: 1.75mm; MANUFACTURER_NAME: Texas Instruments; MANUFACTURER_PART_NUMBER: TLC59731DR; MOUSER_PART_NUMBER: 595-TLC59731DR; MOUSER_PRICE-STOCK: https://www.mouser.co.uk/ProductDetail/Texas-Instruments/TLC59731DR?qs=s44pgLhgXQgiW%2FpyLmUsDA%3D%3D
R1 R2 R4 R5 R149 R165 R166 R182 R186 R187 R194 R198 R199 R203-R205 = 6P1_EVB
R79 R81 R87 R90 R92 R95 = MyComponents; MOUSER: 660-RK73H2ATTDD1R00F
S2 = stock-perso; DESCRIPTION: Tactile Switches 3.9x2.9x2.0mm 160gf Packaging Temp 80oC; HEIGHT: 2mm; MANUFACTURER_NAME: ALPS; MANUFACTURER_PART_NUMBER: SKRKAEE020; MOUSER_PART_NUMBER: 688-SKRKAEE020; MOUSER_PRICE-STOCK: https://www.mouser.co.uk/ProductDetail/ALPS/SKRKAEE020?qs=MrosSN5%252BUQW89XjXIp8Ugw%3D%3D
S32 S33 S_12 S_22 SW_42 SW_43 SW_46 SW_47 SW_52 SW_65 = Switch; CREATED_BY: PCBLayout.com; DIGI_KEY_PART_NUMBER: SW400-ND; MANUFACTURER: Omron Electronics Inc-EMC Div; MPN: B3F-1000; PACKAGE: SPST-NO
STLINK = MyComponents; MOUSER: 649-75867-331LF
TLV75533 = TLV75533PDBVR; AVAILABILITY: Unavailable; DESCRIPTION: Linear Voltage Regulator IC 1 Output 500mA SOT-23-5; MF: Texas Instruments; MP: TLV75533PDBVR; PACKAGE: SOT-23 Texas Instruments; PRICE: None